# Altium PCB LED Driver 8W.PcbDoc
Units mm, origin at the board's own origin, x right, y up, seen from the top; angles counter-clockwise.
Board outline 57 x 57 mm, 2 copper layers (Top Layer, Bottom Layer), stack 1.571 mm thick; 16 components, 13 nets, 68 pads, 0 vias.
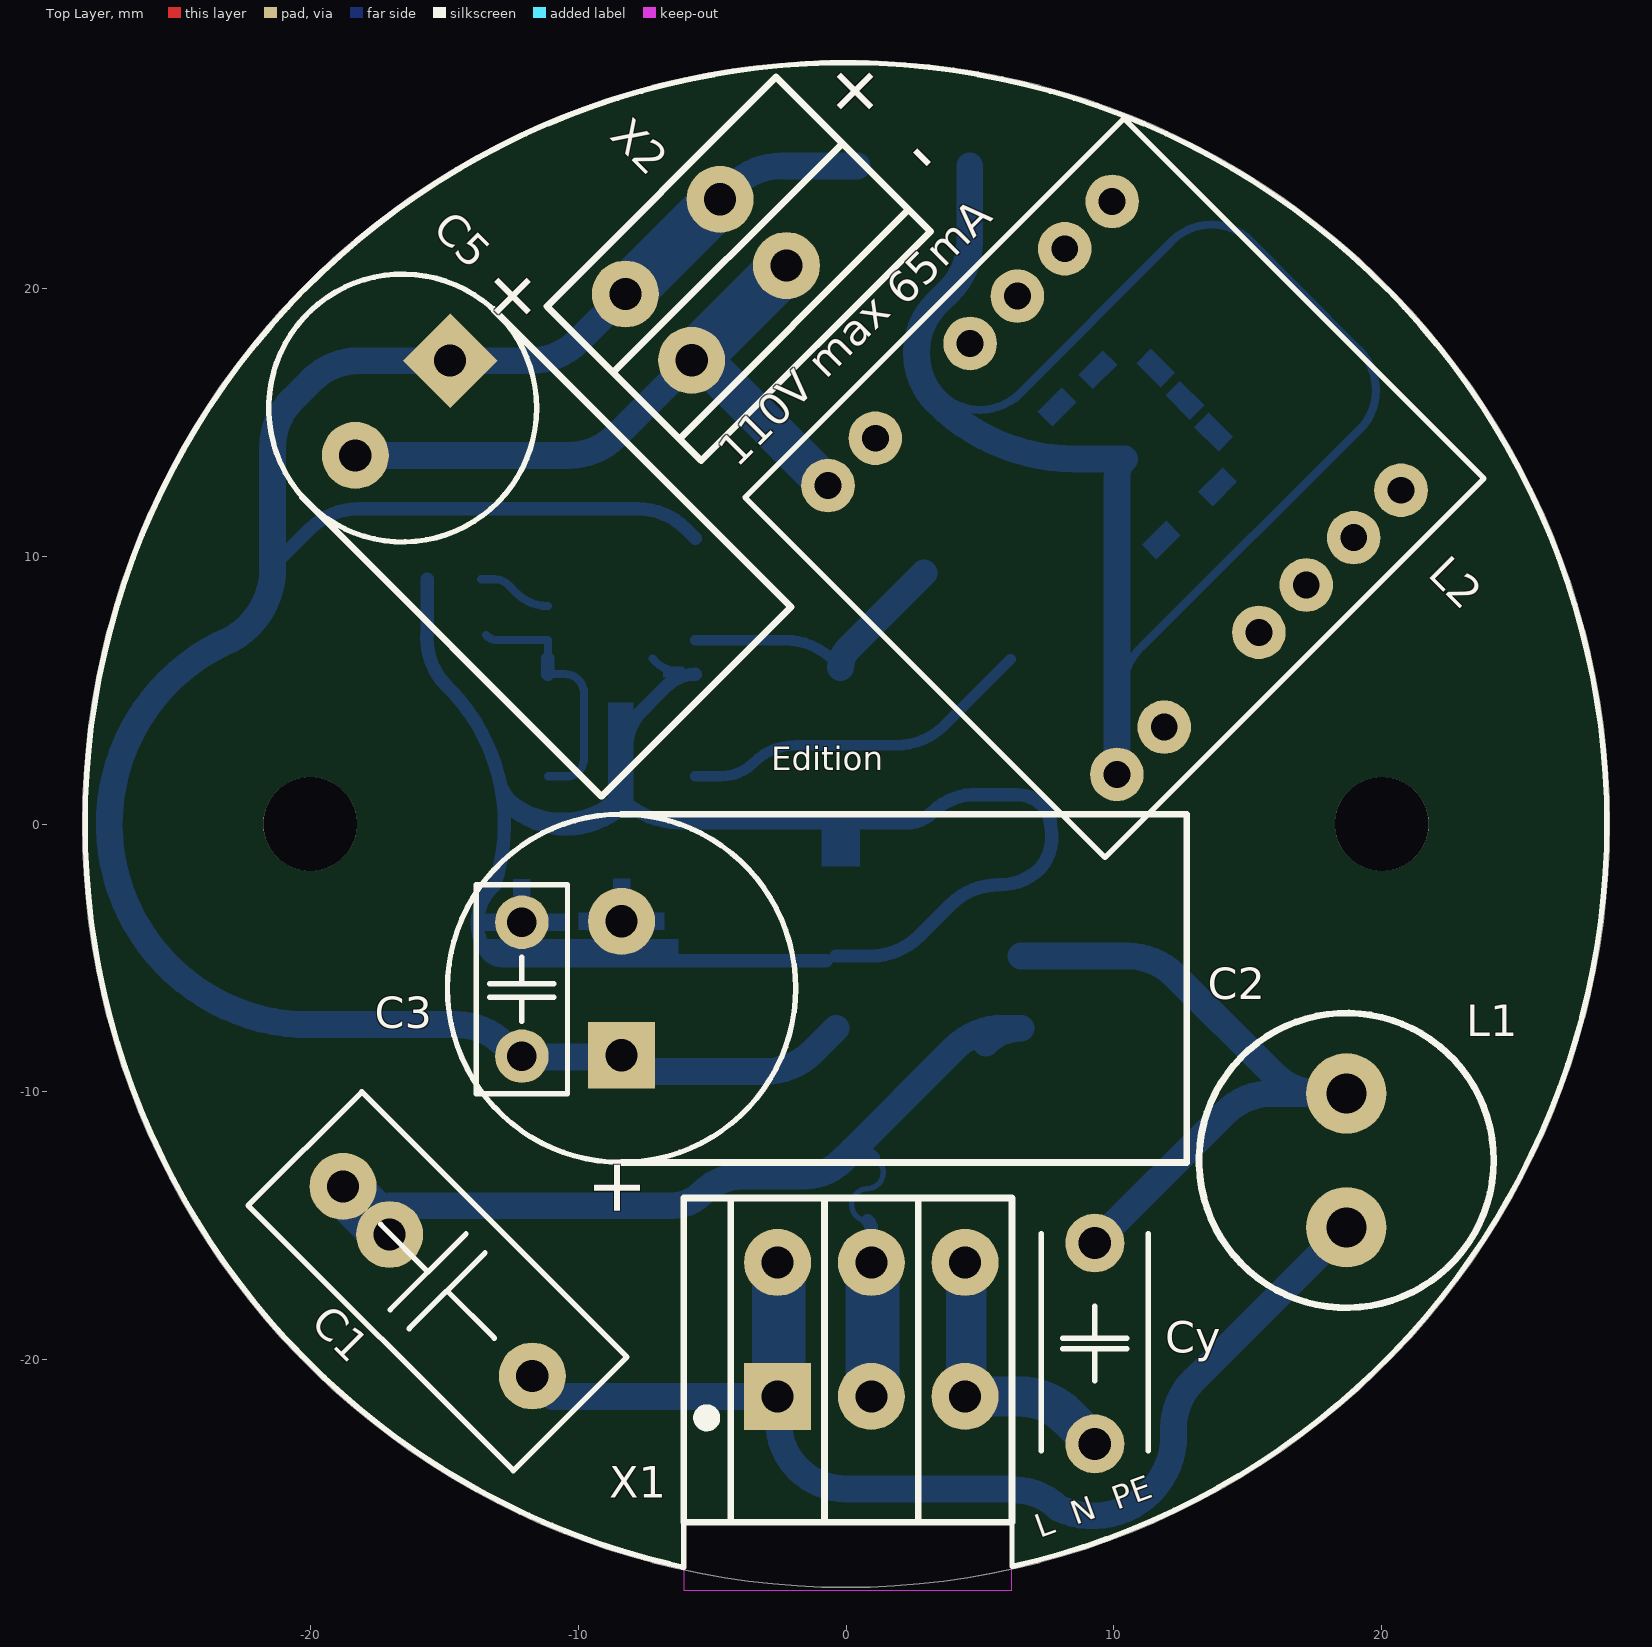
[diagram p0: Top Layer view]
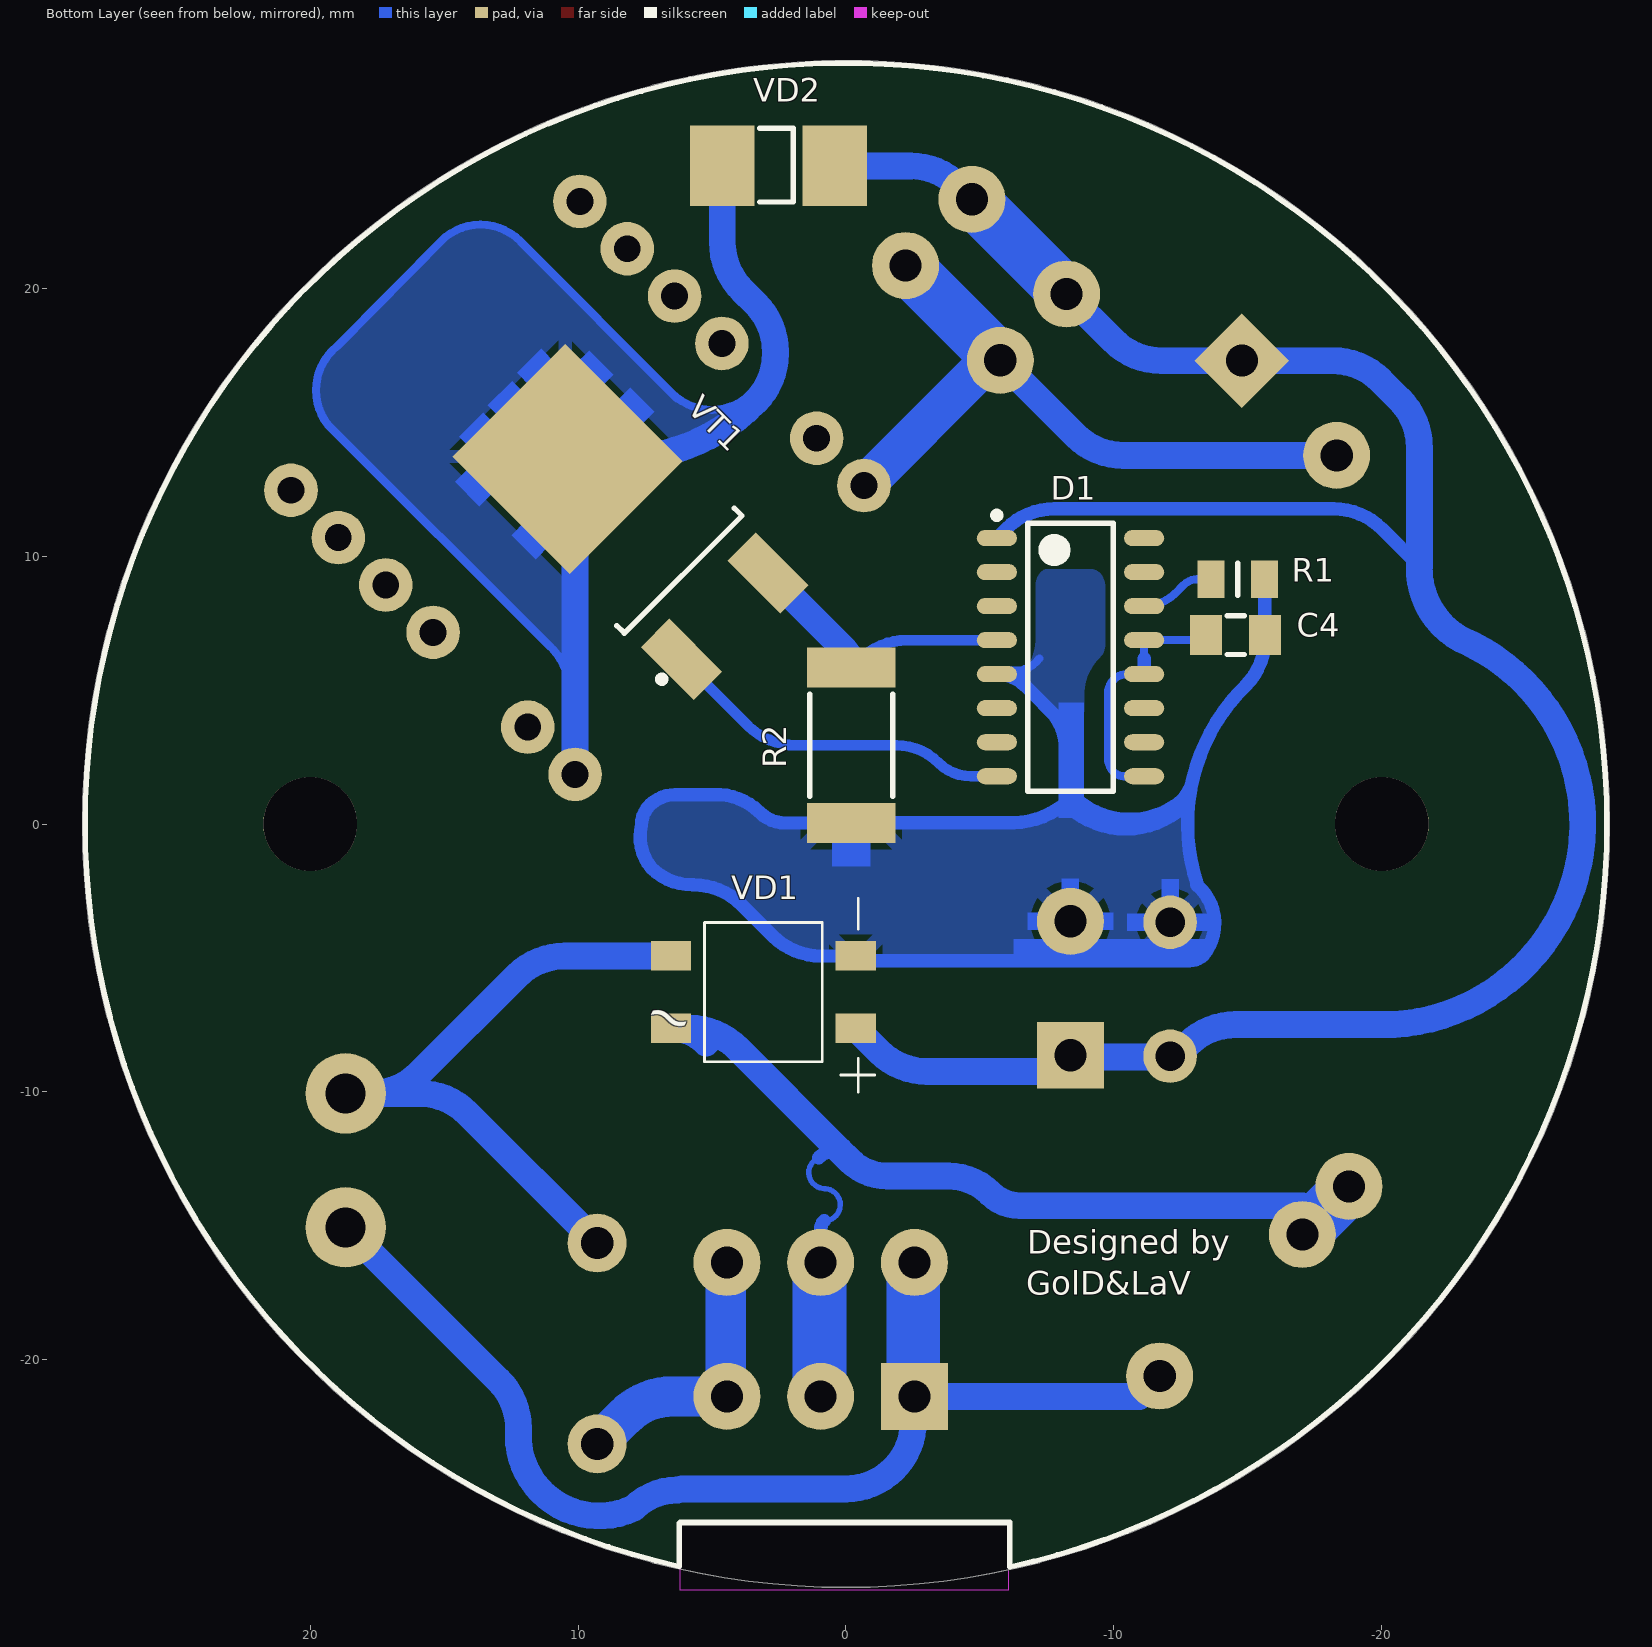
[diagram p1: Bottom Layer view, seen from below]
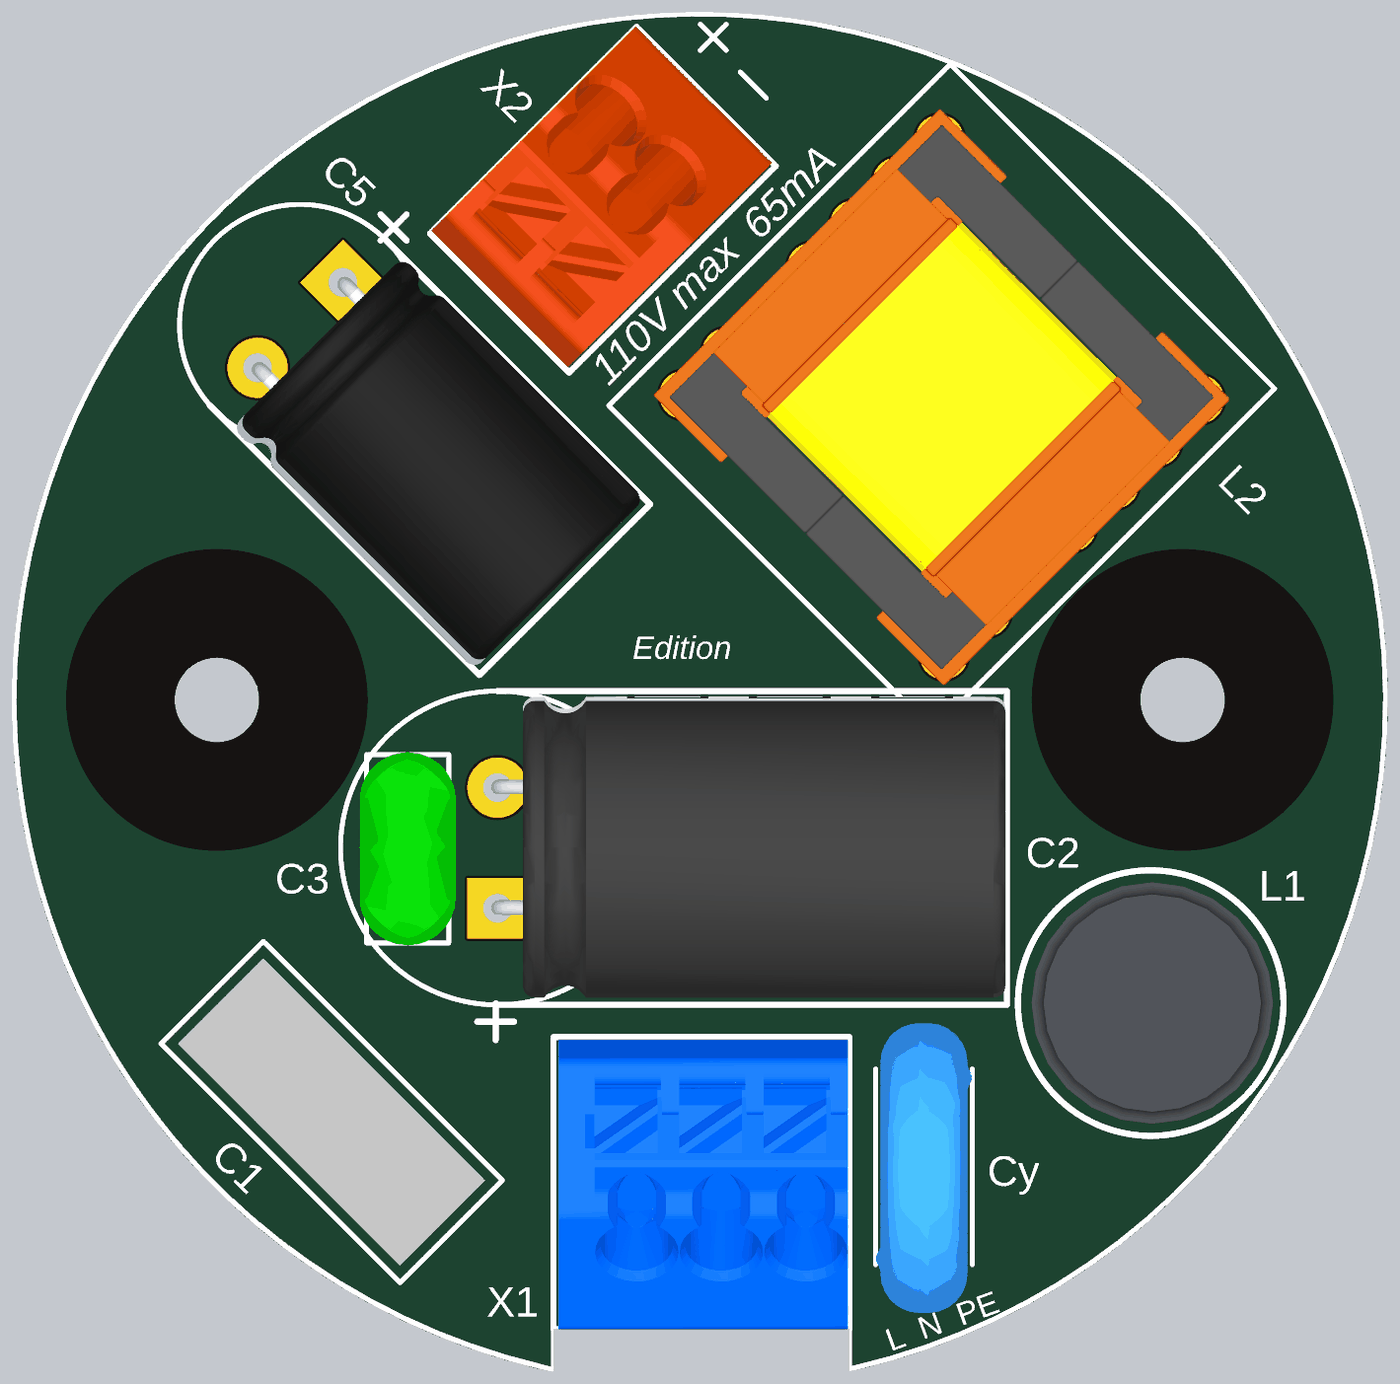
[diagram p2: 3D render of the assembled board from above, using the file's embedded part models]
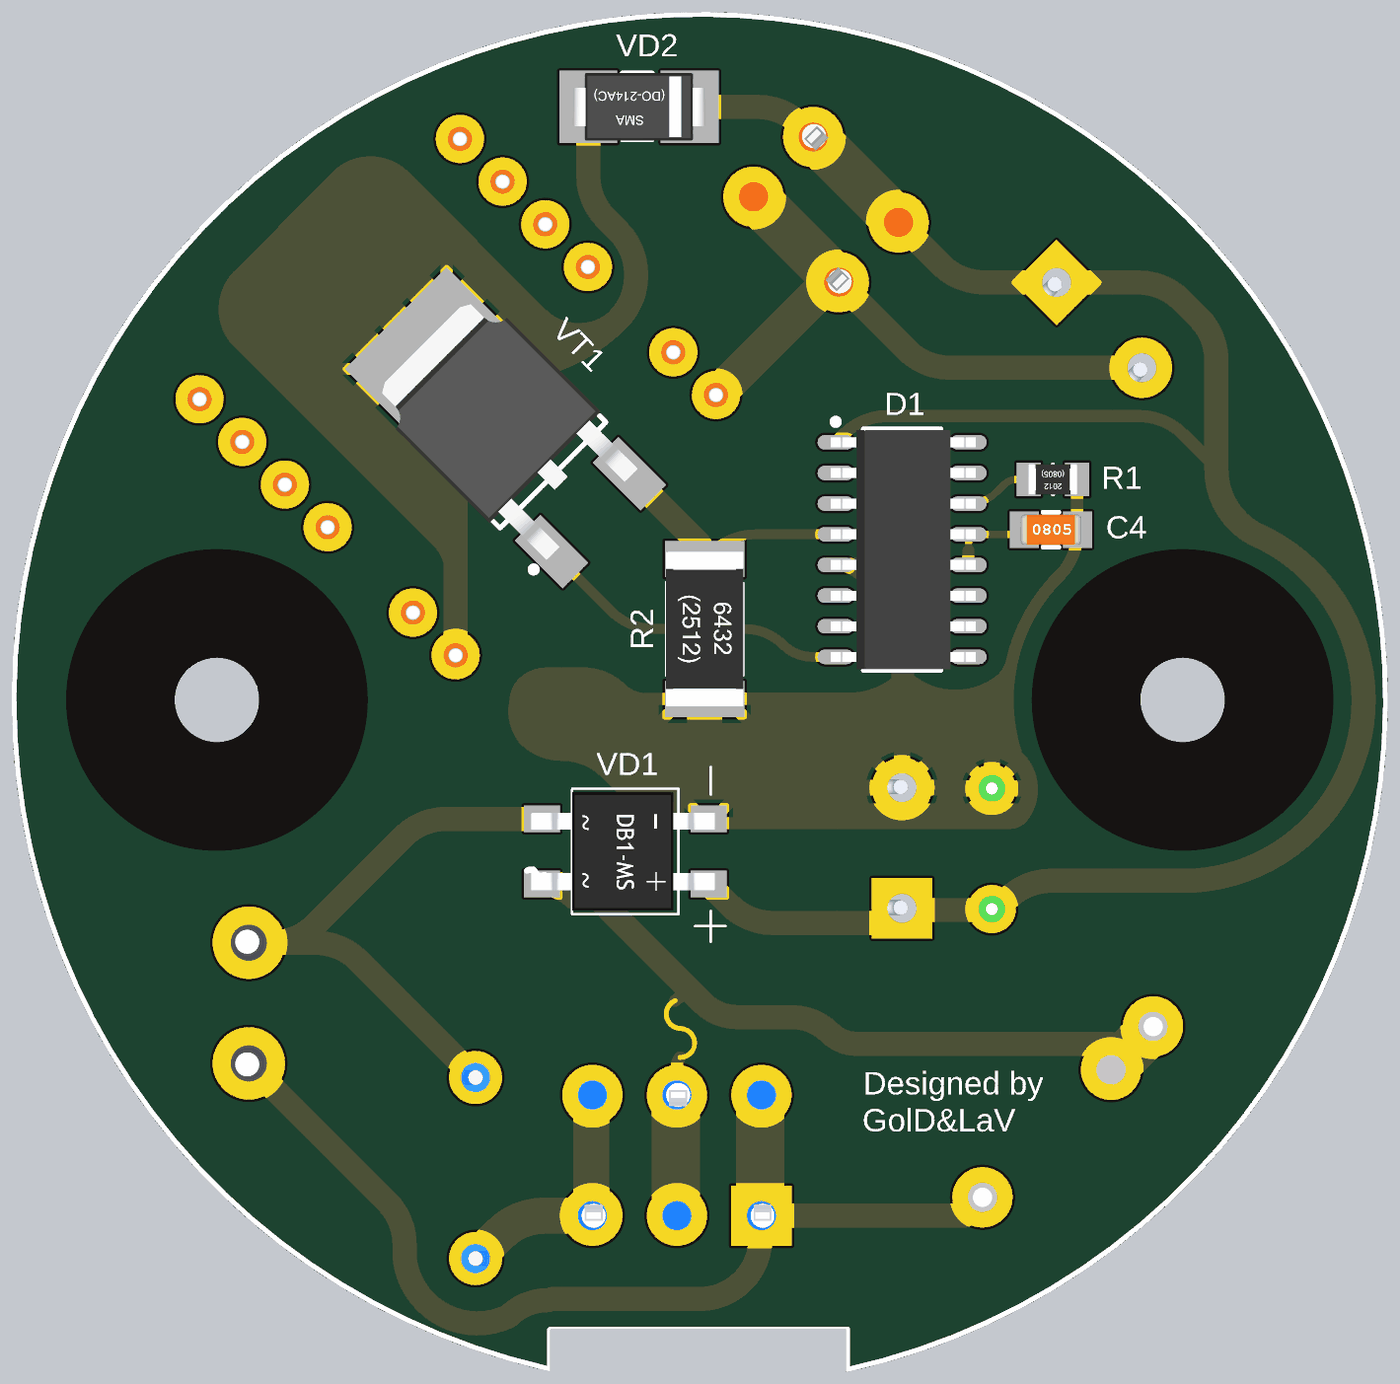
[diagram p3: 3D render of the assembled board from below, using the file's embedded part models]

## Layer stack, top to bottom
Top Layer: signal copper 0.0356
Dielectric: core 1.5, FR-4, Dk 4.8
Bottom Layer: signal copper 0.0356

## Board outline
-28.5,0 ccw(c0,0) 0,-28.5 ccw(c0,0) 28.5,0 ccw(c0,0) 0,28.5 ccw(c0,0)
cut-out: -6.054,-26.066 -6.054,-28.598 6.196,-28.598 6.196,-26.066

## Design rules (kind name [scope] priority, off if disabled: settings)
Clearance [All] p1: gap=0.254
PlaneConnect [All] p1: planeconnectstyle=Relief reliefexpansion=0.508 reliefentries=4 reliefconductorwidth=0.5 reliefairgap=0.254
PolygonConnect [All] p1: connectstyle=Relief reliefconductorwidth=0.5 reliefentries=4 polygonreliefangle="45 Angle" airgapwidth=0.254
RoutingVias [All] p1: holewidth=0.711 width=1.27 viastyle="Through Hole" minholewidth=0.711 minwidth=1.27 maxholewidth=0.711 maxwidth=1.27
SilkscreenOverComponentPads [IsPad] p1: minsilkscreentomaskgap=0.254
SolderMaskExpansion [All] p1: expansion=0.102
Width [All] p1: maxlimit=2.5 minlimit=0.1 preferedwidth=0.254
26 further rules are at their usual default settings.

## Components (designator, comment, footprint, x,y, rotation, side; value= is the part's Value field where it differs from the comment)
C1 "Cap1" "CAPR6.0x13.0-10.0 (MKP-104K0305AB1101-P)" -15.246,-17.069 r315 top
C2 "Cap Pol" "CAPR E 12.5X20, PITCH 5MM; HOR." -8.377,-6.133 r90 top
C3 "Cap1" CAPR5.0x13.0-5.0 -12.098,-6.165 r270 top
C4 "Cap_SMD" "CAPC2012 (0805)" -14.545,7.053 r180 bottom
C5 "Cap Pol" "CAPR E 10x12.5 pitch 5 - hor" -16.549,15.528 r225 top
Cy "Cap (Y)" "CAPR Y - 7.5" 9.287,-19.392 r90 top
D1 "HV9961 (SO16)" SOIC127P602-16BN -8.38,6.228 r180 bottom
L1 "3 mH" "Choke Barbell" 18.679,-12.557 r90 top
L2 "LED.E16-30mH-0.5g.V" VRI-E16-8-G 10.023,12.546 r45 top
R1 "Res 1/8W" RESC2012(0805) -14.627,9.137 r0 bottom (schematic designator R14)
R2 "Res 1W_1" RESC6332 -0.202,2.939 r270 bottom (schematic designator R8)
VD1 "Diode Bridge" DB1-MS 3.084,-6.276 r90 bottom
VD2 "Diode HS1x" "CD4532-1812 (mod)" 2.517,24.567 r180 bottom
VT1 "FQD5N50" "D-PAK (TO252)" 7.567,10.799 r45 bottom
X1 "Connector_3_pin" ZIP-BALLAST3 -4.554,-23.966 r180 top
X2 "Connector_output_2pin_nobody" "ZIP-Ballast2 - duplicate" 3.503,18.794 r315 top

## Footprints (in the part's own frame and the unit in brackets; to place one, negate y for a bottom-side part, rotate by r counter-clockwise, add the part's x,y. Pads: shape width x height; smd on the part's side, far side on the other; paste and mask are expansions set on the pad)
"CAPC2012 (0805)" [mm] "Chip Capacitor, Body 2.0x1.3mm, IPC Medium Density"
  rect 1.2x1.5 smd: 1(-1.1,0) 2(1.1,0)
  silkscreen extent -0.33,-0.72 0.33,0.72, body extent -1.25,-0.62 1.25,0.62, height 0.79
CAPR5.0x13.0-5.0 [mm] "Capacitor class X 2,Thru-Hole Body 5.0 x 13.0 mm (WxT) Pin Spacing 5.0 mm (typ)"
  round 2 hole 1.1: 1(-2.5,0) 2(2.5,0)
  silkscreen extent -3.9,-1.7 3.9,1.7, body extent -4,-2 4,2, height 12.18
"CAPR6.0x13.0-10.0 (MKP-104K0305AB1101-P)" [mm] "Capacitor class X 2,Thru-Hole Body 13.0 x 6.0 mm (WxT) Pin Spacing 10.0 mm (typ)"
  round 2.5 hole 1.2: 2(5,0)
  silkscreen extent -7,-3 7,3, body extent -6.5,-2.5 6.5,2.5, height 12
"CAPR E 10x12.5 pitch 5 - hor" [mm] "CCapacitor Electrolytic Radial; 2 Leads 10 x12.5 mm(DxH), pitch 5mm"
  rect 2.5x2.5 hole 1.2: 1(-2.5,0)
  round 2.5 hole 1.2: 2(2.5,0)
  silkscreen extent -5,-5 5,15.5, body extent -5,-0.2 5,15.2, height 10.19
"CAPR E 12.5X20, PITCH 5MM; HOR." [mm] "CCapacitor Electrolytic Radial; 2 Leads 12.5 x20 mm(DxH), pitch 5mm"
  rect 2.5x2.5 hole 1.2: 1(-2.5,0)
  round 2.5 hole 1.2: 2(2.5,0)
  silkscreen extent -6.5,-21.1 6.5,6.5, body extent -6.2,-21.05 6.28,0.25, height 12.75
"CAPR Y - 7.5" [mm] "Capacitor class Y 2,Thru-Hole Body 4.0 x 13.0 mm (WxT) Pin Spacing  7.5  mm (typ)"
  round 2.2 hole 1.2: 1(-3.75,0) 2(3.75,0)
  silkscreen extent -4,-2 4.1,2, body extent -6,-1.99 6,1.99, height 14.96
"CD4532-1812 (mod)" [mm] "Chip Diode; Body 4.5 x 3.2 mm (LxW typ)"
  rect 2.4x3 smd: 1(-2.1,0) 2(2.1,0)
  silkscreen extent -0.7,-1.35 0.55,1.4, body extent -2.75,-1.4 2.75,1.4, height 2.6
"Choke Barbell" [mm] "Choke Barbell"
  round 3 hole 1.5 unplated: 1(-2.5,0) 2(2.5,0)
  silkscreen extent -5.5,-5.5 5.5,5.5, body extent -5,-5.07 5,4.93, height 12.41
"D-PAK (TO252)" [mm] "D-PAK, 4-Leads, Body 6.2x7mm."
  rect 2.8x1.5 smd: 1(-4.3,2.28) 3(-4.3,-2.28)
  rect 6.2x5.95 smd: 2(4,0)
  silkscreen extent -4.42,-3.1 -1.7,3.45, body extent -4.4,-3.27 5.54,3.27, height 2.37
DB1-MS [mm]
  rect 1.1x1.5 smd: 1(1.35,3.45) 2(-1.35,3.45) 3(-1.35,-3.45) 4(1.35,-3.45)
  silkscreen extent -3.74,-4.16 3.5,2.2, body extent -2.45,-3.7 2.45,3.9, height 2.9
RESC2012(0805) [mm] "Chip Resistor, Body 2.0x1.3mm, IPC Medium Density"
  rect 1x1.4 smd: 1(-1,0) 2(1,0)
  silkscreen extent 0,-0.6 0,0.6, body extent -1,-0.62 1,0.63, height 0.43
RESC6332 [mm] "Chip Resistor, Body 6.3x3.2mm, IPC High Density"
  rect 1.5x3.3 smd: 1(-2.9,0) 2(2.9,0)
  silkscreen extent -1.9,-1.55 1.9,1.55, body extent -3.2,-1.6 3.2,1.6, height 0.6
SOIC127P602-16BN [mm] "SOIC, 16-Leads, Body 9.9x3.9mm, Pitch 1.27mm, IPC Medium Density"
  oval 1.5x0.6 smd: 1(-2.75,4.445) 2(-2.75,3.175) 3(-2.75,1.905) 4(-2.75,0.635) 5(-2.75,-0.635) 6(-2.75,-1.905) 7(-2.75,-3.175) 8(-2.75,-4.445) 9(2.75,-4.445) 10(2.75,-3.175) 11(2.75,-1.905) 12(2.75,-0.635) 13(2.75,0.635) 14(2.75,1.905) 15(2.75,3.175) 16(2.75,4.445)
  silkscreen extent -2.88,-5 1.6,5.42, body extent -2.95,-5 3.05,5, height 1.73
VRI-E16-8-G [mm] "Choke Ballast Voltage Preheat"
  round 2 hole 1: 1(-7.5,7.625) 2(-5,7.625) 4(0,7.625) 5(2.5,7.625) 6(5,7.625) 7(7.5,7.625) 8(7.5,-7.625) 9(5,-7.625) 11(0,-7.625) 13(-5,-7.625) 14(-7.5,-7.625)
  round 2 hole 1 unplated: 10(2.5,-7.625)
  silkscreen extent -10,-9.5 10,9.5, body extent -8.4,-8.53 8.4,8.53, height 13.1
"ZIP-Ballast2 - duplicate" [mm] "In-Line; 2 Zig-Zag Leads; Body 8.5x 12mm; Pitch 3.5 mm"
  round 2.5 hole 1.2: 1(-9,-7.6) 1(-9,-2.6) 2(-5.5,-2.6) 2(-5.5,-7.6)
  silkscreen extent -10.75,-10 -2.6,2.1, body extent -10.8,-9.9 -2.8,2.1, height 13.2
ZIP-BALLAST3 [mm] "In-Line; 3 Zig-Zag Leads; Body 12x 12mm; Pitch 3.5 mm"
  round 2.5 hole 1.2: 1(-2,-7.6) 2(-5.5,-2.6) 2(-5.5,-7.6) 3(-9,-2.6) 3(-9,-7.6)
  rect 2.5x2.5 hole 1.2: 1(-2,-2.6)
  silkscreen extent -10.75,-10 1.5,2.1, body extent -10.7,-9.9 1.3,2.1, height 1.5

## Part data
C1 C3: "Capacitor GOST"
C2 C5: "Cap Pol GOST"
C4: "Ceramic"
Cy: "Disc Ceramic"
D1: "IC LED Driver Buck"
L1: library part "Choke Barbell", "Barbell 10 mm(d)"
L2: library part "Choke LED E16", "LED.E16-30mH-0.5g.H"
R1 R2: "Resistor GOST"
VD1: "Diode Bridge GOST"
VD2: "Diode HS1x (GOST)"
VT1: "MOSFET N-channel (GOST)"

## Free pads (board coordinates)
  round 2.5 hole 1.2: 0(-18.774,-13.527) 1(-17.035,-15.323)
  round 3.5 hole 3.5 unplated mask+4.5: 1(-20,0) 2(20,0)

## Nets (pads, with @x,y where several pads share a name; then routed paths per layer and width w, separated by ;. In a path a pad name is that pad's centre, name@x,y a point inside that pad or via, vN(x,y) a via of type N, cw(c..) or ccw(c..) an arc to the next point about the centre after c; other vN are vias at no path point)
NetC1_1: pad.0 pad.1@-17.035,-15.323 VD1.2 X1.2 | length 41
  Bottom Layer w0.2: 0.771,-13.61 ccw(c0.79,-13.01) 1.023,-12.458 ccw(c0.79,-13.01) 0.785,-12.41 ; 0.791,-13.614 ccw(c0.811,-14.213) 0.816,-14.813
  Bottom Layer w0.5: 0.246,-12.181 0.355,-12.181 cw(c0.355,-13.125) 1.023,-12.458 ; 0.816,-14.813 cw(c0.503,-15.126) 0.946,-15.126 X1.2@0.946,-16.366
  Bottom Layer w1: pad.1@-17.035,-14.248 -6.494,-14.248 ccw(c-6.494,-12.682) -5.387,-13.79 cw(c-3.823,-15.354) -3.823,-13.142 -1.55,-13.142 ccw(c-1.55,-11.125) -0.124,-12.551 0.246,-12.181 4.057,-8.37 cw(c5.853,-10.166) 5.853,-7.626 VD1.2 ccw(c6.534,-9.483) 5.221,-8.17
  Bottom Layer w2: pad.0 -18.774,-13.584 pad.1@-17.035,-15.323 ; X1.2@0.99,-21.233 X1.2@0.99,-16.391
NetC1_2: C1.2 L1.1 X1.1 | length 43.8
  Bottom Layer w1: C1.2 -10.948,-21.366 X1.1@-2.554,-21.366 ; X1.1@-2.51,-21.233 -2.51,-22.321 ccw(c-0.029,-22.321) -1.784,-24.074 ccw(c-0.029,-22.321) -1.783,-24.075 ccw(c0.013,-22.279) 0.013,-24.819 6.118,-24.819 ; 6.3,-24.864 cw(c6.3,-27.164) 7.926,-25.537 ccw(c9.218,-22.804) 12.225,-23.112 12.225,-22.564 cw(c14.765,-22.564) 12.969,-20.768 L1.1
  Bottom Layer w2: X1.1@-2.51,-21.233 X1.1@-2.51,-16.233
NetC2_1: C2.1 C3.2 C5.1 D1.1 VD1.3 VD2.2 X2.1 | length 92.2
  Bottom Layer w0.5: -21.403,9.622 -20.007,11.017 cw(c-18.211,9.221) -18.211,11.761 -7.771,11.761 cw(c-7.771,9.221) -5.975,11.017 D1.1
  Bottom Layer w1: -21.403,9.622 -21.403,14.057 cw(c-18.863,14.057) -20.659,15.853 -19.959,16.552 cw(c-18.163,14.756) -18.163,17.296 C5.1 -11.775,17.296 ccw(c-11.775,19.836) -9.979,18.04 X2.1@-8.235,19.784 ; -21.4,9.622 cw(c-24.422,9.536) -22.946,6.897 ccw(c-20,0) -20.444,-7.487 -14.553,-7.487 cw(c-14.553,-10.027) -12.757,-8.231 -12.285,-8.702 -8.377,-8.702 ccw(c-7.079,-7.404) -7.079,-9.24 -3.032,-9.24 ccw(c-3.032,-6.7) -1.236,-8.496 VD1.3 ; X2.1@-4.7,23.32 -4.196,23.823 cw(c-2.4,22.027) -2.4,24.567 VD2.2
  Bottom Layer w2: X2.1@-8.235,19.784 X2.1@-4.7,23.32
NetC2_2: C2.2 C3.1 C4.2 D1.5 R1.1 R2.2 VD1.4 | length 73.1
  Bottom Layer w0.3: -7.217,6.182 ccw(c-6.324,6.825) D1.5@-6.145,5.738
  Bottom Layer w0.5: R1.1 -15.627,7.071 C4.2 -15.645,6.938 ccw(c-13.105,6.938) -15.489,6.062 ccw(c-13.105,6.938) -14.901,5.142 -14.637,4.879 cw(c-20,0) -12.798,0.831 ; -13.345,-4.887 ccw(c-12.824,-4.366) -12.824,-5.103 VD1.4@-0.743,-5.103 ; -13.304,-4.931 cw(c-11.894,-3.706) -13.099,-2.278 ; -13.232,2.598 cw(c-20,0) -13.116,-2.276 ; -12.868,1.384 ccw(c-11.165,2.151) -11.837,0.408 ; -12.833,1.17 ccw(c-10.59,3.182) -8.578,0.938 ; -12.574,0.642 ccw(c-10.442,2.968) -8.559,0.436 ; -8.309,0.876 ccw(c-6.177,3.202) -5.977,0.053 -0.236,0.053 cw(c-0.236,0.004) R2.2 2.254,0.039 ccw(c2.254,1.43) 3.237,0.446 cw(c4.829,-1.165) 4.689,1.096 6.368,1.096 cw(c6.368,-0.263) 7.329,0.698 cw(c6.591,-0.04) 7.634,-0.04 cw(c5.83,-0.468) 7.274,-1.632 cw(c5.728,-0.086) 5.728,-2.272 5.695,-2.272 ccw(c5.695,-4.812) 3.899,-3.016 2.733,-4.182 cw(c0.937,-2.386) 0.937,-4.926 VD1.4 ; -8.174,2.97 cw(c-6.402,2.92) -7.822,3.981 ; -7.979,3.862 -6.686,5.156 cw(c-5.63,4.1) D1.5
  Bottom Layer w1: C3.1@-12.331,-3.656 C3.1@-12.285,-3.702
NetC4_1: C4.1 D1.9 D1.12 D1.13 | length 9.6
  Bottom Layer w0.3: C4.1@-13.444,7.052 ccw(c-12.985,7.512) -12.985,6.863 D1.13 -11.13,6.18 ; D1.9 -10.375,1.783 ccw(c-10.375,2.322) -9.994,1.941 ccw(c-10.522,2.469) -9.775,2.469 -9.775,4.857 ccw(c-10.528,4.857) -9.996,5.389 ccw(c-10.487,4.898) -10.487,5.593 D1.12
  Bottom Layer w0.5: D1.12 -11.13,6.18
NetC5_2: C5.2 L2.1 X2.2 | length 25.9
  Bottom Layer w1: C5.2 -10.361,13.761 ccw(c-10.361,16.301) -8.565,14.505 X2.2@-5.76,17.309
  Bottom Layer w1.5: X2.2@-5.76,17.309 cw(c-5.76,16.312) -5.055,17.017 L2.1
  Bottom Layer w2: X2.2@-5.76,17.309 X2.2@-2.225,20.845
NetCy_1: Cy.1 X1.3 | length 10.5
  Bottom Layer w1.5: X1.3@4.446,-21.366 6.459,-21.366 cw(c6.459,-23.906) 8.255,-22.11 Cy.1 ; X1.3@4.49,-21.233 X1.3@4.49,-16.233
NetCy_2: Cy.2 L1.2 VD1.1 | length 24.7
  Bottom Layer w1: VD1.1 10.493,-4.926 cw(c10.493,-7.466) 12.289,-5.67 15.932,-9.314 ccw(c17.728,-7.517) L1.2@17.728,-10.057 ; Cy.2 14.127,-10.801 cw(c15.924,-12.597) 15.924,-10.057 L1.2@17.728,-10.057 ; L1.2 L1.2@17.728,-10.057
NetD1_4: D1.4 R2.1 VT1.3 | length 10.5
  Bottom Layer w0.4: D1.4 -2.278,6.863 cw(c-2.278,4.323) R2.1@-0.482,6.119 ; R2.1@-0.482,6.119 R2.1
  Bottom Layer w1: R2.1 cw(c0.804,5.839) 0.093,6.549 VT1.3
NetD1_8: D1.8 VT1.1 | length 13.3
  Bottom Layer w0.4: D1.8 -4.664,1.783 ccw(c-4.664,3.494) -3.454,2.284 cw(c-1.872,0.703) -1.872,2.939 1.879,2.939 ccw(c1.879,5.479) 3.675,3.683 VT1.1
NetD1_14: D1.14 R1.2 | length 2.8
  Bottom Layer w0.3: R1.2 -13.119,9.137 cw(c-13.119,8.406) -12.603,8.923 -12.295,8.615 ccw(c-11.13,9.779) D1.14
NetF1_1: 
NetL2_14: L2.14 VD2.1 VT1.2 | length 66
  Bottom Layer w0.254: 18.976,17.891 cw(c18.915,17.83) 19.002,17.83
  Bottom Layer w0.3: 3.693,15.927 ccw(c5.01,17.562) 6.504,16.086 ; 6.308,15.882 12.147,21.748 cw(c13.641,20.273) 14.959,21.908 19.002,17.83 cw(c17.684,16.195) 19.319,14.877 11.087,6.661 ccw(c12.463,5.075) 10.363,5.062
  Bottom Layer w1: VD2.1 4.617,21.718 cw(c2.077,21.718) 3.873,19.922 3.38,19.43 ccw(c5.176,17.634) 2.636,17.634 2.636,17.555 ccw(c5.176,17.555) 3.38,15.759 ccw(c8.527,20.906) 8.527,13.627 VT1.2 ccw(c11.08,12.943) 10.112,12.943 L2.14
pads on no net: D1.2 D1.3 D1.6 D1.7 D1.10 D1.11 D1.15 D1.16 L2.2 L2.4 L2.5 L2.6 L2.7 L2.8 L2.9 L2.10 L2.11 L2.13

## Polygon pours and split planes (outlines as drawn)
NetC2_2 on Bottom Layer "Bottom Layer-No Net" (solid, pour order 36): -12.574,0.642 ccw(c-10.865,2.351) -10.865,-0.066 -10.81,-0.066 -10.303,-0.066 ccw(c-10.303,2.474) -8.507,0.678 -8.309,0.876 -8.204,0.771 ccw(c-6.407,2.567) -6.407,0.027 -6.338,0.027 -3.169,0.027 ccw(c-3.169,0.116) -3.106,0.053 ccw(c-3.072,0.087) -3.072,0.039 -0.202,0.039 2.254,0.039 ccw(c2.254,1.81) 3.506,0.558 3.694,0.745 cw(c4.54,-0.101) 4.54,1.096 5.528,1.096 6.589,1.096 cw(c6.589,0.374) 7.099,0.884 7.359,0.625 cw(c6.695,-0.04) 7.634,-0.04 7.634,-0.762 cw(c6.404,-0.762) 7.274,-1.632 7.087,-1.818 cw(c6.173,-0.904) 6.173,-2.197 5.77,-2.197 ccw(c5.77,-4.737) 3.974,-2.941 3.899,-3.016 2.733,-4.182 cw(c0.937,-2.386) 0.937,-4.926 -12.489,-4.926 cw(c-12.489,-3.598) -13.428,-4.537 cw(c-12.98,-4.09) -13.613,-4.09 -13.613,-3.217 -13.613,-2.875 cw(c-13.376,-2.875) -13.544,-2.707 -12.981,-2.144 ccw(c-13.02,-2.105) -12.964,-2.105 ccw(c-13.367,-1.702) -12.798,-1.702 -12.798,0.831
NetL2_14 on Bottom Layer "Bottom Layer-No Net" (solid, pour order 26): 4.194,15.444 5.339,15.444 ccw(c5.339,16.584) 6.145,15.778 12.181,21.814 cw(c13.747,20.249) 13.747,22.463 cw(c13.747,20.875) 14.869,21.998 14.952,21.915 19.295,17.572 cw(c18.028,16.306) 19.819,16.305 19.819,16.085 cw(c18.111,16.085) 19.319,14.877 11.095,6.653 ccw(c12.891,4.857) 10.351,4.857 10.351,4.557 9.963,4.557 cw(c10.173,4.738) 9.904,4.671 9.904,8.873 ccw(c8.173,8.845) 9.377,10.088 6.993,12.645 5.839,13.867 cw(c6.082,15.434) 4.802,14.498
NetC2_2 on Bottom Layer "Bottom Layer-No Net" (solid, pour order 32): -8.888,4.54 -8.888,4.795 ccw(c-10.894,4.795) -9.476,6.214 cw(c-8.971,6.718) -9.684,6.718 -9.684,7.364 -9.684,8.822 cw(c-8.862,8.822) -9.444,9.403 cw(c-9.175,9.135) -9.175,9.514 -8.456,9.514 -7.697,9.514 -7.523,9.514 cw(c-7.523,9.219) -7.314,9.428 -7.26,9.374 cw(c-7.696,8.938) -7.079,8.938 -7.079,6.979 ccw(c-4.885,6.979) -6.436,5.427 -7.572,4.292 cw(c-8.015,4.735) -8.015,4.108 -8.889,4.108

## Other copper
Bottom Layer:
  region net NetC2_2: -7.867,-3.305 -7.867,-3.96 -6.771,-3.96 -6.771,-3.305
  region net NetC2_2: -11.587,-3.338 -11.587,-3.993 -10.491,-3.993 -10.491,-3.338
  region net NetC2_2: -12.608,-3.993 -12.608,-3.338 -13.704,-3.338 -13.704,-3.993
  region net NetC2_2: -8.888,-3.96 -8.888,-3.305 -9.984,-3.305 -9.984,-3.96
  rectangle net NetC2_2: -8.705,-3.122 -8.05,-2.026
  rectangle net NetC2_2: -12.425,-3.155 -11.77,-2.059
  rectangle net NetC2_2: -13.584,-4.922 -6.244,-4.298
  rectangle net NetC2_2: -0.923,-1.582 0.522,-0.138
  region net NetL2_14: 10.131,17.138 9.584,17.685 8.671,16.772 9.218,16.225
  region net NetL2_14: 8.607,15.75 8.06,16.297 7.148,15.385 7.695,14.838
  region net NetL2_14: 12.497,10.785 11.95,11.332 11.038,10.42 11.585,9.873
  region net NetL2_14: 14.604,12.767 14.057,13.314 13.144,12.402 13.691,11.855
  region net NetL2_14: 13.906,13.906 14.453,14.453 13.541,15.366 12.994,14.819
  region net NetL2_14: 12.831,15.086 13.378,15.633 12.466,16.545 11.919,15.998
  region net NetL2_14: 11.746,16.294 12.293,16.841 11.381,17.753 10.834,17.206
  rectangle net NetC2_2: -8.888,0.221 -7.929,4.54
  rectangle net NetC2_2: -6.834,5.469 -6.377,5.741

## Silkscreen, mask and mechanical layers (free items; w line width, h text height)
Top Overlay:
  lines w0.2: -6.591,-27.613 cw(c-0.003,0.014) -28.405,0.014 cw(c-0.003,0.014) 4.92,27.986 ; -6.104,-27.738 cw(c0,0) -28.402,0 cw(c0,0) -4.932,27.97 ; -6.054,-27.738 -6.054,-26.066 ; 6.196,-27.71 6.196,-26.066 ; 6.232,-27.71 ccw(c0,0) 28.402,0 ; 28.402,0 ccw(c0,0) 4.932,27.97 cw(c0,0) 28.402,0
  text "+" at 0.137,25.935 h2 r45
  text "-" at 3.731,25.048 h2 r135
  text "65mA" at 2.469,19 h2 r45
  text "110V max" at -3.782,12.981 h2 r45
  text "Edition" at -2.787,1.702 h1.52
  text "L  N  PE" at 7.349,-26.943 h1.5 r20
Bottom Overlay:
  lines w0.2: -6.118,-27.733 -6.118,-26.066 6.196,-26.066 ; -6.118,-26.127 -6.087,-26.095 6.224,-26.095 6.223,-26.097 6.223,-27.712 ccw(c0,0) 28.402,0 ccw(c0,0) 4.932,27.97 ccw(c0,0) -28.402,0 ccw(c0,0) -6.115,-27.736
  text "Designed by" at -6.769,-16.339 h1.52
  text "GolD&LaV" at -6.732,-17.872 h1.52
Bottom Solder:
  lines w0.2: 0.771,-13.61 ccw(c0.79,-13.01) 1.023,-12.458 ; 0.793,-13.61 ccw(c0.814,-14.21) 0.819,-14.81
Mechanical 3:
  circle w0.1: c0,0 r28.5
  circle w0.2: c20,0 r1.817
  circle w0.2: c-20,0 r1.794

## Dimensions
20,0 to 34.487,10.137 on Mechanical 3
-20.153,20.153 to -417,-341.5 on Mechanical 3

## Text inside footprints (layer, text, board x,y; h text height)
C2: Top Overlay "+" at -7.677,-14.733 h2 r90
C5: Top Overlay "+" at -12.235,21.115 h2 r225
VD1: Bottom Overlay "~" at 7.684,-7.476 h1.52 r25